# Altium PCB Transfomer_partly-interleaved.PcbDoc (part 2 of 2)
Units mm, origin at the board's own origin, x right, y up, seen from the top; angles counter-clockwise.
Board outline 177 x 117 mm, 6 copper layers (Top Layer, Mid-Layer 1, Mid-Layer 2, Mid-Layer 3, Mid-Layer 4, Bottom Layer); 9 components, 18 nets, 68 pads, 540 vias.
Unrouted connection lines stored in the file: 15.
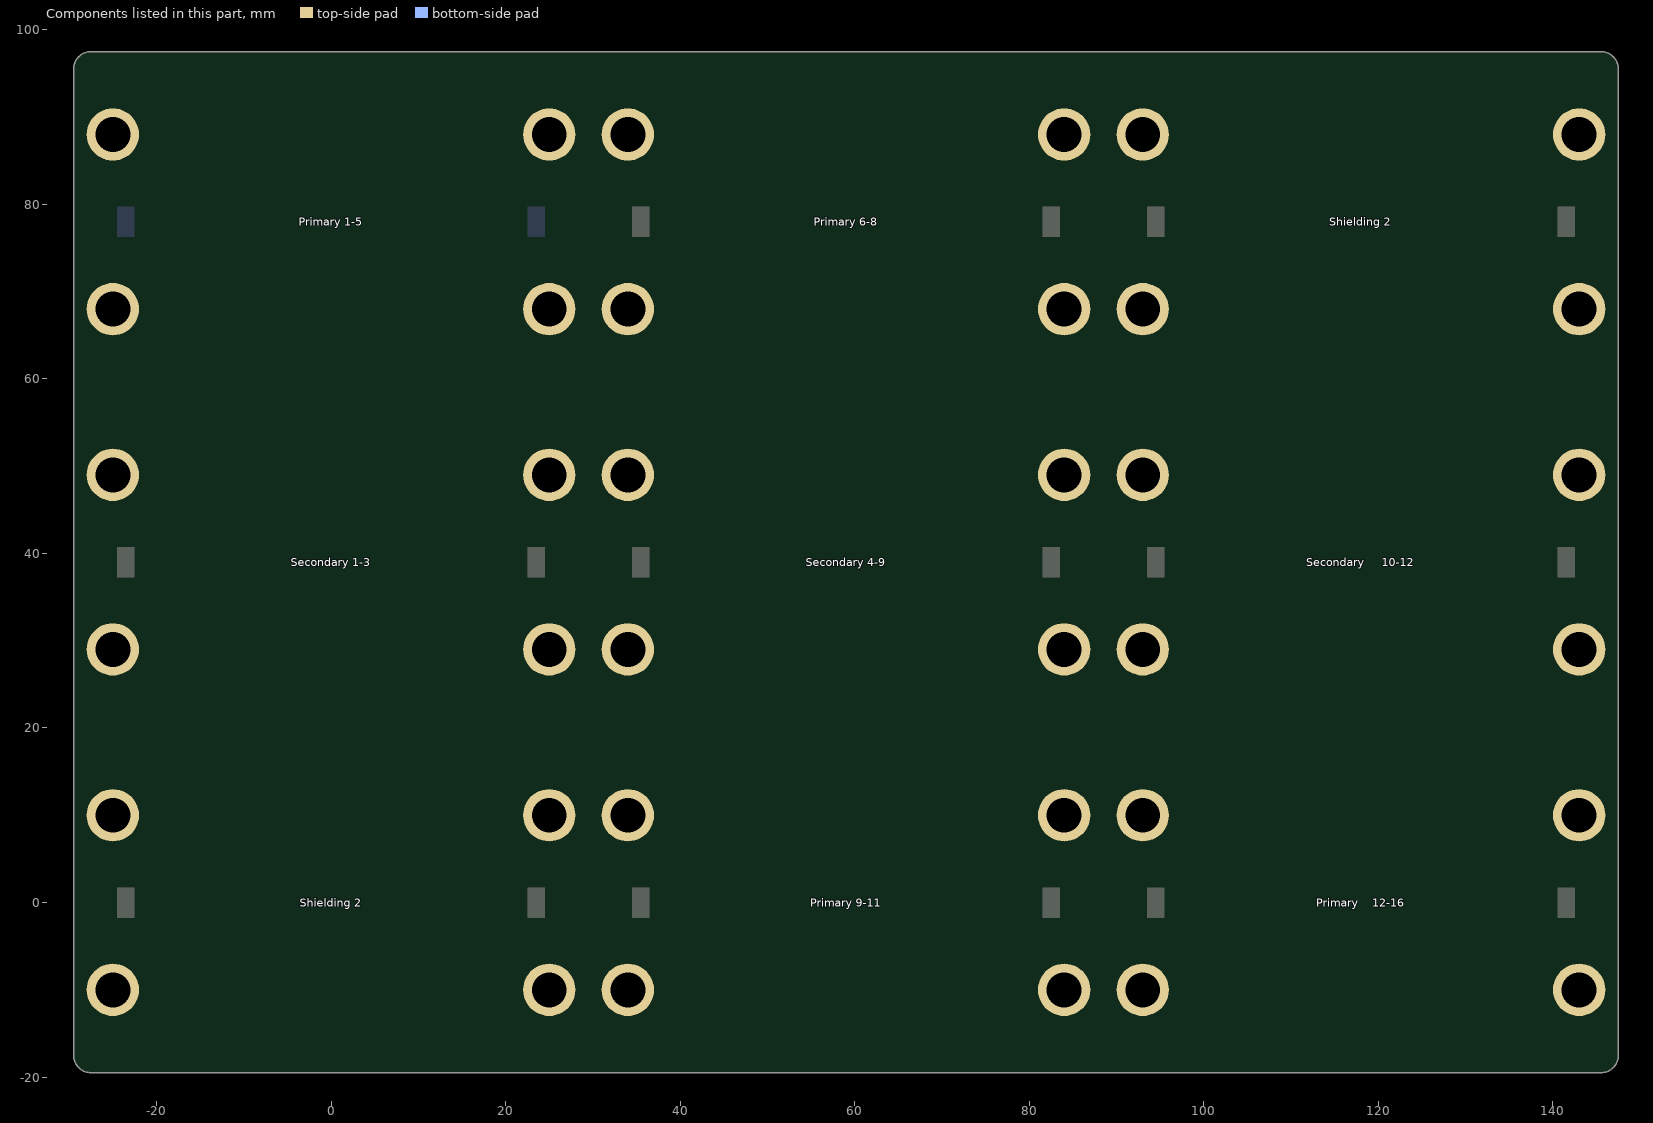
[diagram p6: the components of this part, seen from the top]

## Keep-outs (continued)
Mid-Layer 2:
  circle w1: c93,-10 r3.5
  circle w1: c143,-10 r3.5
  circle w1: c93,10 r3.5
  circle w1: c84,10 r3.5
  circle w1: c34,10 r3.5
  circle w1: c84,-10 r3.5
  circle w1: c34,-10 r3.5
  circle w1: c25,10 r3.5
  circle w1: c25,-10 r3.5
  circle w1: c-25,10 r3.5
  circle w1: c-25,-10 r3.5
  circle w1: c143,49 r3.5
  circle w1: c143,29 r3.5
  circle w1: c93,49 r3.5
  circle w1: c93,29 r3.5
  circle w1: c34,29 r3.5
  circle w1: c34,49 r3.5
  circle w1: c84,29 r3.5
  circle w1: c84,49 r3.5
  circle w1: c25,49 r3.5
  circle w1: c-25,49 r3.5
  circle w1: c25,29 r3.5
  circle w1: c-25,29 r3.5
  circle w1: c143,88 r3.5
  circle w1: c143,68 r3.5
  circle w1: c93,88 r3.5
  circle w1: c93,68 r3.5
  circle w1: c34,68 r3.5
  circle w1: c34,88 r3.5
  circle w1: c84,68 r3.5
  circle w1: c84,88 r3.5
  circle w1: c25,88 r3.5
  circle w1: c25,68 r3.5
  circle w1: c-25,88 r3.5
  circle w1: c-25,68 r3.5
  lines w1: -29,-6.5 -25,-6.5 ; -29,6.5 -25,6.5 ; -29,32.5 -25,32.5 ; -29,45.5 -25,45.5 ; -29,71.5 -25,71.5 ; -29,84.5 -25,84.5 ; -21.5,-14 -21.5,-10 ; -21.5,10 -21.5,14 ; -21.5,25 -21.5,29 ; -21.5,49 -21.5,53 ; -21.5,64 -21.5,68 ; -21.5,88 -21.5,92 ; -11,19.947 cw(c0,39) -11,58.053 ; 5.25,31.75 14,31.75 ccw(c14,35.75) 18,35.75 18,38.5 cw(c25,38.5) 25,45.5 29,45.5 ; 21.5,-14 21.5,-10 ; 21.5,10 21.5,14 ; 21.5,25 21.5,29 ; 21.5,49 21.5,53 ; 21.5,64 21.5,68 ; 21.5,88 21.5,92 ; 25,-6.5 29,-6.5 ; 25,6.5 29,6.5 ; 25,32.5 29,32.5 ; 25,71.5 29,71.5 ; 25,84.5 29,84.5 ; 30,-6.5 34,-6.5 ccw(c34,0.5) 41,0.5 41,3.25 cw(c45,3.25) 45,7.25 53.75,7.25 ; 30,6.5 34,6.5 ; 30,32.5 34,32.5 ccw(c34,39.5) 41,39.5 41,42.25 cw(c45,42.25) 45,46.25 53.75,46.25 ; 30,39 33,39 33,32.5 ; 30,45.5 34,45.5 ; 30,71.5 34,71.5 ; 30,84.5 34,84.5 ; 37.5,-14 37.5,-10 ; 37.5,10 37.5,14 ; 37.5,25 37.5,29 ; 37.5,49 37.5,53 ; 37.5,64 37.5,68 ; 37.5,88 37.5,92 ; 70,-19.053 ccw(c59,0) 70,19.053 ; 70,19.947 ccw(c59,39) 70,58.053 ; 80.5,-14 80.5,-10 ; 80.5,10 80.5,14 ; 80.5,25 80.5,29 ; 80.5,49 80.5,53 ; 80.5,64 80.5,68 ; 80.5,88 80.5,92 ; 84,-6.5 88,-6.5 ; 84,6.5 88,6.5 ; 84,32.5 88,32.5 ; 84,45.5 88,45.5 ; 84,71.5 88,71.5 ; 84,84.5 88,84.5 ; 89,-6.5 93,-6.5 ; 89,6.5 93,6.5 ; 89,32.5 93,32.5 ; 89,45.5 93,45.5 ; 89,71.5 93,71.5 ; 89,78 92,78 92,84.5 ; 89,84.5 93,84.5 cw(c93,77.5) 100,77.5 100,74.75 ccw(c104,74.75) 104,70.75 112.75,70.75 ; 96.5,-14 96.5,-10 ; 96.5,10 96.5,14 ; 96.5,25 96.5,29 ; 96.5,49 96.5,53 ; 96.5,64 96.5,68 ; 96.5,88 96.5,92 ; 107,-19.053 cw(c118,0) 107,19.053 ; 123,7.5 140.5,7.5 ; 129,58.947 ccw(c118,78) 129,97.053 ; 139.5,-14 139.5,-10 ; 139.5,25 139.5,29 ; 139.5,49 139.5,53 ; 139.5,64 139.5,68 ; 139.5,88 139.5,92 ; 140.525,7.525 ccw(c143,10) 143,6.5 147,6.5 ; 143,-6.5 147,-6.5 ; 143,32.5 147,32.5 ; 143,45.5 147,45.5 ; 143,71.5 147,71.5 ; 143,84.5 147,84.5
  lines w3: 31.5,33.5 31.5,38 ; 90.5,79 90.5,83.5
  lines w4: -9.959,33.25 cw(c0,39) -9.959,44.75 ; 68.959,-5.75 ccw(c59,0) 68.959,5.75 ; 68.959,33.25 ccw(c59,39) 68.959,44.75 ; 108.041,-5.75 cw(c118,0) 108.041,5.75 ; 127.959,-5.75 ccw(c118,0) 127.959,5.75 ; 127.959,72.25 ccw(c118,78) 127.959,83.75
Mid-Layer 3:
  circle w1: c93,-10 r3.5
  circle w1: c93,10 r3.5
  circle w1: c143,-10 r3.5
  circle w1: c143,10 r3.5
  circle w1: c34,-10 r3.5
  circle w1: c34,10 r3.5
  circle w1: c84,-10 r3.5
  circle w1: c84,10 r3.5
  circle w1: c25,-10 r3.5
  circle w1: c-25,-10 r3.5
  circle w1: c25,10 r3.5
  circle w1: c-25,10 r3.5
  circle w1: c93,49 r3.5
  circle w1: c143,49 r3.5
  circle w1: c93,29 r3.5
  circle w1: c143,29 r3.5
  circle w1: c84,49 r3.5
  circle w1: c34,49 r3.5
  circle w1: c84,29 r3.5
  circle w1: c34,29 r3.5
  circle w1: c25,49 r3.5
  circle w1: c25,29 r3.5
  circle w1: c-25,49 r3.5
  circle w1: c-25,29 r3.5
  circle w1: c93,88 r3.5
  circle w1: c143,88 r3.5
  circle w1: c93,68 r3.5
  circle w1: c143,68 r3.5
  circle w1: c34,88 r3.5
  circle w1: c84,88 r3.5
  circle w1: c34,68 r3.5
  circle w1: c84,68 r3.5
  circle w1: c25,88 r3.5
  circle w1: c-25,88 r3.5
  circle w1: c-25,68 r3.5
  lines w1: -29,-6.5 -25,-6.5 ccw(c-25,0.5) -18,0.5 -18,3.25 cw(c-14,3.25) -14,7.25 -5.25,7.25 ; -29,0 -26,0 -26,-6.5 ; -29,6.5 -25,6.5 ; -29,32.5 -25,32.5 ; -29,45.5 -25,45.5 ; -29,71.5 -25,71.5 ; -29,84.5 -25,84.5 ; -21.5,-14 -21.5,-10 ; -21.5,10 -21.5,14 ; -21.5,25 -21.5,29 ; -21.5,49 -21.5,53 ; -21.5,64 -21.5,68 ; -21.5,88 -21.5,92 ; -11,58.947 cw(c0,78) -11,97.053 ; 5,70.5 22.5,70.5 ; 11,-19.053 ccw(c0,0) 11,19.053 ; 21.5,-14 21.5,-10 ; 21.5,10 21.5,14 ; 21.5,25 21.5,29 ; 21.5,49 21.5,53 ; 21.5,88 21.5,92 ; 22.525,70.475 cw(c25,68) 25,71.5 29,71.5 ; 25,-6.5 29,-6.5 ; 25,6.5 29,6.5 ; 25,32.5 29,32.5 ; 25,45.5 29,45.5 ; 25,84.5 29,84.5 ; 30,-6.5 34,-6.5 ; 30,6.5 34,6.5 ; 30,32.5 34,32.5 ; 30,39 33,39 33,45.5 ; 30,45.5 34,45.5 cw(c34,38.5) 41,38.5 41,35.75 ccw(c45,35.75) 45,31.75 53.75,31.75 ; 30,71.5 34,71.5 ; 30,84.5 34,84.5 cw(c34,77.5) 41,77.5 41,74.75 ccw(c45,74.75) 45,70.75 53.75,70.75 ; 37.5,-14 37.5,-10 ; 37.5,10 37.5,14 ; 37.5,25 37.5,29 ; 37.5,49 37.5,53 ; 37.5,64 37.5,68 ; 37.5,88 37.5,92 ; 70,19.947 ccw(c59,39) 70,58.053 ; 70,58.947 ccw(c59,78) 70,97.053 ; 80.5,-14 80.5,-10 ; 80.5,10 80.5,14 ; 80.5,25 80.5,29 ; 80.5,49 80.5,53 ; 80.5,64 80.5,68 ; 80.5,88 80.5,92 ; 84,-6.5 88,-6.5 ; 84,6.5 88,6.5 ; 84,32.5 88,32.5 ; 84,45.5 88,45.5 ; 84,71.5 88,71.5 ; 84,84.5 88,84.5 ; 89,-6.5 93,-6.5 ; 89,6.5 93,6.5 ; 89,32.5 93,32.5 ; 89,45.5 93,45.5 ; 89,71.5 93,71.5 ; 89,84.5 93,84.5 ; 96.5,-14 96.5,-10 ; 96.5,10 96.5,14 ; 96.5,25 96.5,29 ; 96.5,49 96.5,53 ; 96.5,64 96.5,68 ; 96.5,88 96.5,92 ; 107,19.947 cw(c118,39) 107,58.053 ; 123.25,46.25 132,46.25 cw(c132,42.25) 136,42.25 136,39.5 ccw(c143,39.5) 143,32.5 147,32.5 ; 139.5,-14 139.5,-10 ; 139.5,10 139.5,14 ; 139.5,25 139.5,29 ; 139.5,49 139.5,53 ; 139.5,64 139.5,68 ; 139.5,88 139.5,92 ; 143,-6.5 147,-6.5 ; 143,6.5 147,6.5 ; 143,45.5 147,45.5 ; 143,71.5 147,71.5 ; 143,84.5 147,84.5
  lines w3: -27.5,-5.5 -27.5,-1 ; 31.5,40 31.5,44.5
  lines w4: -9.959,72.25 cw(c0,78) -9.959,83.75 ; 9.959,-5.75 ccw(c0,0) 9.959,5.75 ; 9.959,72.25 ccw(c0,78) 9.959,83.75 ; 68.959,33.25 ccw(c59,39) 68.959,44.75 ; 68.959,72.25 ccw(c59,78) 68.959,83.75 ; 108.041,33.25 cw(c118,39) 108.041,44.75
Mid-Layer 4:
  circle w1: c143,10 r3.5
  circle w1: c93,10 r3.5
  circle w1: c143,-10 r3.5
  circle w1: c34,-10 r3.5
  circle w1: c84,-10 r3.5
  circle w1: c34,10 r3.5
  circle w1: c84,10 r3.5
  circle w1: c25,10 r3.5
  circle w1: c-25,10 r3.5
  circle w1: c25,-10 r3.5
  circle w1: c-25,-10 r3.5
  circle w1: c93,29 r3.5
  circle w1: c93,49 r3.5
  circle w1: c143,29 r3.5
  circle w1: c143,49 r3.5
  circle w1: c34,29 r3.5
  circle w1: c34,49 r3.5
  circle w1: c84,29 r3.5
  circle w1: c84,49 r3.5
  circle w1: c-25,29 r3.5
  circle w1: c25,29 r3.5
  circle w1: c-25,49 r3.5
  circle w1: c25,49 r3.5
  circle w1: c143,88 r3.5
  circle w1: c143,68 r3.5
  circle w1: c93,88 r3.5
  circle w1: c93,68 r3.5
  circle w1: c84,88 r3.5
  circle w1: c84,68 r3.5
  circle w1: c34,88 r3.5
  circle w1: c34,68 r3.5
  circle w1: c25,88 r3.5
  circle w1: c25,68 r3.5
  circle w1: c-25,88 r3.5
  circle w1: c-25,68 r3.5
  lines w1: -29,-6.5 -25,-6.5 ; -29,0 -26,0 -26,6.5 ; -29,6.5 -25,6.5 cw(c-25,-0.5) -18,-0.5 -18,-3.25 ccw(c-14,-3.25) -14,-7.25 -5.25,-7.25 ; -29,32.5 -25,32.5 ; -29,45.5 -25,45.5 cw(c-25,38.5) -18,38.5 -18,35.75 ccw(c-14,35.75) -14,31.75 -5.25,31.75 ; -29,71.5 -25,71.5 ; -29,84.5 -25,84.5 ; -21.5,-14 -21.5,-10 ; -21.5,10 -21.5,14 ; -21.5,25 -21.5,29 ; -21.5,49 -21.5,53 ; -21.5,64 -21.5,68 ; -21.5,88 -21.5,92 ; 11,-19.053 ccw(c0,0) 11,19.053 ; 11,19.947 ccw(c0,39) 11,58.053 ; 21.5,-14 21.5,-10 ; 21.5,10 21.5,14 ; 21.5,25 21.5,29 ; 21.5,49 21.5,53 ; 21.5,64 21.5,68 ; 21.5,88 21.5,92 ; 25,-6.5 29,-6.5 ; 25,6.5 29,6.5 ; 25,32.5 29,32.5 ; 25,45.5 29,45.5 ; 25,71.5 29,71.5 ; 25,84.5 29,84.5 ; 30,-6.5 34,-6.5 ; 30,6.5 34,6.5 ; 30,32.5 34,32.5 ; 30,45.5 34,45.5 ; 30,71.5 34,71.5 ; 30,84.5 34,84.5 ; 37.5,-14 37.5,-10 ; 37.5,10 37.5,14 ; 37.5,25 37.5,29 ; 37.5,49 37.5,53 ; 37.5,64 37.5,68 ; 37.5,88 37.5,92 ; 48,-19.053 cw(c59,0) 48,19.053 ; 64.25,7.25 73,7.25 cw(c73,3.25) 77,3.25 77,0.5 ccw(c84,0.5) 84,-6.5 88,-6.5 ; 80.5,-14 80.5,-10 ; 80.5,10 80.5,14 ; 80.5,25 80.5,29 ; 80.5,49 80.5,53 ; 80.5,64 80.5,68 ; 80.5,88 80.5,92 ; 84,6.5 88,6.5 ; 84,32.5 88,32.5 ; 84,45.5 88,45.5 ; 84,71.5 88,71.5 ; 84,84.5 88,84.5 ; 89,-6.5 93,-6.5 cw(c93,-10) 95.475,-7.525 ; 89,6.5 93,6.5 ; 89,32.5 93,32.5 ; 89,45.5 93,45.5 ; 89,71.5 93,71.5 ; 89,84.5 93,84.5 ; 92,-6.5 92,6.5 ; 95.5,-7.5 113,-7.5 ; 96.5,10 96.5,14 ; 96.5,25 96.5,29 ; 96.5,49 96.5,53 ; 96.5,64 96.5,68 ; 96.5,88 96.5,92 ; 107,58.947 cw(c118,78) 107,97.053 ; 123.25,85.25 132,85.25 cw(c132,81.25) 136,81.25 136,78.5 ccw(c143,78.5) 143,71.5 147,71.5 ; 129,-19.053 ccw(c118,0) 129,19.053 ; 139.5,-14 139.5,-10 ; 139.5,10 139.5,14 ; 139.5,25 139.5,29 ; 139.5,49 139.5,53 ; 139.5,64 139.5,68 ; 139.5,88 139.5,92 ; 143,-6.5 147,-6.5 ; 143,6.5 147,6.5 ; 143,32.5 147,32.5 ; 143,45.5 147,45.5 ; 143,84.5 147,84.5
  lines w3: -27.5,1 -27.5,5.5 ; 90.5,-5.5 90.5,5.5
  lines w4: 9.959,-5.75 ccw(c0,0) 9.959,5.75 ; 9.959,33.25 ccw(c0,39) 9.959,44.75 ; 49.041,-5.75 cw(c59,0) 49.041,5.75 ; 108.041,72.25 cw(c118,78) 108.041,83.75 ; 127.959,-5.75 ccw(c118,0) 127.959,5.75
Bottom Layer:
  circle w1: c143,10 r3.5
  circle w1: c93,10 r3.5
  circle w1: c143,-10 r3.5
  circle w1: c93,-10 r3.5
  circle w1: c34,10 r3.5
  circle w1: c84,10 r3.5
  circle w1: c34,-10 r3.5
  circle w1: c84,-10 r3.5
  circle w1: c25,10 r3.5
  circle w1: c-25,10 r3.5
  circle w1: c25,-10 r3.5
  circle w1: c-25,-10 r3.5
  circle w1: c143,49 r3.5
  circle w1: c143,29 r3.5
  circle w1: c93,49 r3.5
  circle w1: c93,29 r3.5
  circle w1: c34,29 r3.5
  circle w1: c34,49 r3.5
  circle w1: c84,29 r3.5
  circle w1: c84,49 r3.5
  circle w1: c-25,29 r3.5
  circle w1: c25,29 r3.5
  circle w1: c-25,49 r3.5
  circle w1: c25,49 r3.5
  circle w1: c93,88 r3.5
  circle w1: c93,68 r3.5
  circle w1: c143,88 r3.5
  circle w1: c143,68 r3.5
  circle w1: c84,88 r3.5
  circle w1: c84,68 r3.5
  circle w1: c34,88 r3.5
  circle w1: c34,68 r3.5
  circle w1: c25,88 r3.5
  circle w1: c25,68 r3.5
  circle w1: c-25,88 r3.5
  circle w1: c-25,68 r3.5
  lines w1: -29,-6.5 -25,-6.5 ; -29,0 -26,0 -26,6.5 ; -29,6.5 -25,6.5 ; -29,32.5 -25,32.5 ; -29,45.5 -25,45.5 ; -29,71.5 -25,71.5 ; -29,84.5 -25,84.5 cw(c-25,77.5) -18,77.5 -18,74.75 ccw(c-14,74.75) -14,70.75 -5.25,70.75 ; -26,71.5 -26,84.5 ; -21.5,-14 -21.5,-10 ; -21.5,10 -21.5,14 ; -21.5,25 -21.5,29 ; -21.5,49 -21.5,53 ; -21.5,64 -21.5,68 ; -21.5,88 -21.5,92 ; 10,60.679 ccw(c0,78) 10,95.321 ; 21.5,-14 21.5,-10 ; 21.5,10 21.5,14 ; 21.5,25 21.5,29 ; 21.5,49 21.5,53 ; 21.5,64 21.5,68 ; 21.5,88 21.5,92 ; 25,-6.5 29,-6.5 ; 25,6.5 29,6.5 ; 25,32.5 29,32.5 ; 25,45.5 29,45.5 ; 25,71.5 29,71.5 ; 25,84.5 29,84.5 ; 26,-6.5 26,6.5 ; 26,32.5 26,45.5 ; 30,-6.5 34,-6.5 ; 30,6.5 34,6.5 ; 30,32.5 34,32.5 ; 30,39 33,39 33,45.5 ; 30,45.5 34,45.5 ; 30,71.5 34,71.5 ; 30,84.5 34,84.5 ; 33,-6.5 33,6.5 ; 37.5,-14 37.5,-10 ; 37.5,10 37.5,14 ; 37.5,25 37.5,29 ; 37.5,49 37.5,53 ; 37.5,64 37.5,68 ; 37.5,88 37.5,92 ; 49,21.679 cw(c59,39) 49,56.321 ; 49,60.679 cw(c59,78) 49,95.321 ; 64.25,46.25 73,46.25 cw(c73,42.25) 77,42.25 77,39.5 ccw(c84,39.5) 84,32.5 88,32.5 ; 64.25,85.25 73,85.25 cw(c73,81.25) 77,81.25 77,78.5 ccw(c84,78.5) 84,71.5 88,71.5 ; 80.5,-14 80.5,-10 ; 80.5,10 80.5,14 ; 80.5,25 80.5,29 ; 80.5,49 80.5,53 ; 80.5,64 80.5,68 ; 80.5,88 80.5,92 ; 84,-6.5 88,-6.5 ; 84,6.5 88,6.5 ; 84,45.5 88,45.5 ; 84,84.5 88,84.5 ; 85,32.5 85,45.5 ; 85,71.5 85,84.5 ; 89,-6.5 93,-6.5 ; 89,6.5 93,6.5 ; 89,32.5 93,32.5 ; 89,45.5 93,45.5 cw(c93,38.5) 100,38.5 100,35.75 ccw(c104,35.75) 104,31.75 112.75,31.75 ; 89,71.5 93,71.5 ; 89,78 92,78 92,84.5 ; 89,84.5 93,84.5 ; 92,32.5 92,45.5 ; 96.5,-14 96.5,-10 ; 96.5,10 96.5,14 ; 96.5,25 96.5,29 ; 96.5,49 96.5,53 ; 96.5,64 96.5,68 ; 96.5,88 96.5,92 ; 128,21.679 ccw(c118,39) 128,56.321 ; 139.5,-14 139.5,-10 ; 139.5,10 139.5,14 ; 139.5,25 139.5,29 ; 139.5,49 139.5,53 ; 139.5,64 139.5,68 ; 139.5,88 139.5,92 ; 143,-6.5 147,-6.5 ; 143,6.5 147,6.5 ; 143,32.5 147,32.5 ; 143,45.5 147,45.5 ; 143,71.5 147,71.5 ; 143,84.5 147,84.5
  lines w3: -27.5,1 -27.5,5.5 ; -27.5,72.5 -27.5,83.5 ; 27.5,-5.5 27.5,5.5 ; 27.5,33.5 27.5,44.5 ; 31.5,-5.5 31.5,5.5 ; 31.5,40 31.5,44.5 ; 86.5,33.5 86.5,44.5 ; 86.5,72.5 86.5,83.5 ; 90.5,33.5 90.5,44.5 ; 90.5,79 90.5,83.5
  lines w4: 9.959,72.25 ccw(c0,78) 9.959,83.75 ; 49.041,33.25 cw(c59,39) 49.041,44.75 ; 49.041,72.25 cw(c59,78) 49.041,83.75 ; 127.959,33.25 ccw(c118,39) 127.959,44.75
Keep-Out Layer:
  lines w0.254: -19.5,19.5 -27.5,19.5 ; -19.5,58.5 -27.5,58.5 ; 19.5,19.5 27.5,19.5 ; 19.5,58.5 27.5,58.5 ; 39.5,19.5 31.5,19.5 ; 39.5,58.5 31.5,58.5 ; 78.5,19.5 86.5,19.5 ; 78.5,58.5 86.5,58.5 ; 98.5,19.5 90.5,19.5 ; 98.5,58.5 90.5,58.5 ; 137.5,19.5 145.5,19.5 ; 137.5,58.5 145.5,58.5 ; -29.5,-17.5 ccw(c-27.5,-17.5) -27.5,-19.5 ; -29.5,-17.5 ccw(c-27.5,-17.5) -27.5,-19.5 ; -29.5,-17.5 -29.5,95.5 ; -29.5,-17.5 -29.5,17.5 cw(c-27.5,17.5) -27.5,19.5 ; -29.5,95.5 cw(c-27.5,95.5) -27.5,97.5 ; -29.5,95.5 cw(c-27.5,95.5) -27.5,97.5 ; -29.5,95.5 cw(c-27.5,95.5) -27.5,97.5 ; -29.5,95.5 -29.5,60.5 ccw(c-27.5,60.5) -27.5,58.5 ; -27.5,-19.5 27.5,-19.5 ccw(c27.5,-17.5) 29.5,-17.5 ; -27.5,-19.5 145.5,-19.5 ; -27.5,19.5 cw(c-27.5,21.5) -29.5,21.5 -29.5,56.5 cw(c-27.5,56.5) -27.5,58.5 ; -27.5,97.5 145.5,97.5 ; -27.5,97.5 27.5,97.5 cw(c27.5,95.5) 29.5,95.5 ; 27.5,19.5 ccw(c27.5,21.5) 29.5,21.5 ; 27.5,19.5 cw(c27.5,17.5) 29.5,17.5 ; 27.5,58.5 cw(c27.5,56.5) 29.5,56.5 ; 27.5,58.5 ccw(c27.5,60.5) 29.5,60.5 ; 29.5,-17.5 ccw(c31.5,-17.5) 31.5,-19.5 86.5,-19.5 ccw(c86.5,-17.5) 88.5,-17.5 ; 29.5,-17.5 29.5,17.5 ; 29.5,17.5 cw(c31.5,17.5) 31.5,19.5 ; 29.5,21.5 ccw(c31.5,21.5) 31.5,19.5 ; 29.5,21.5 29.5,56.5 ; 29.5,56.5 cw(c31.5,56.5) 31.5,58.5 ; 29.5,60.5 ccw(c31.5,60.5) 31.5,58.5 ; 29.5,60.5 29.5,95.5 ; 29.5,95.5 cw(c31.5,95.5) 31.5,97.5 86.5,97.5 cw(c86.5,95.5) 88.5,95.5 ; 86.5,19.5 ccw(c86.5,21.5) 88.5,21.5 ; 86.5,19.5 cw(c86.5,17.5) 88.5,17.5 ; 86.5,58.5 cw(c86.5,56.5) 88.5,56.5 ; 86.5,58.5 ccw(c86.5,60.5) 88.5,60.5 ; 88.5,-17.5 ccw(c90.5,-17.5) 90.5,-19.5 145.5,-19.5 ; 88.5,-17.5 88.5,17.5 ; 88.5,17.5 cw(c90.5,17.5) 90.5,19.5 ; 88.5,21.5 ccw(c90.5,21.5) 90.5,19.5 ; 88.5,21.5 88.5,56.5 ; 88.5,56.5 cw(c90.5,56.5) 90.5,58.5 ; 88.5,60.5 ccw(c90.5,60.5) 90.5,58.5 ; 88.5,60.5 88.5,95.5 ; 88.5,95.5 cw(c90.5,95.5) 90.5,97.5 145.5,97.5 ; 145.5,-19.5 ccw(c145.5,-17.5) 147.5,-17.5 ; 145.5,-19.5 ccw(c145.5,-17.5) 147.5,-17.5 ; 145.5,19.5 ccw(c145.5,21.5) 147.5,21.5 147.5,56.5 ccw(c145.5,56.5) 145.5,58.5 ; 145.5,19.5 cw(c145.5,17.5) 147.5,17.5 147.5,-17.5 ; 145.5,58.5 ccw(c145.5,60.5) 147.5,60.5 147.5,95.5 ; 145.5,97.5 cw(c145.5,95.5) 147.5,95.5 ; 145.5,97.5 cw(c145.5,95.5) 147.5,95.5 ; 145.5,97.5 cw(c145.5,95.5) 147.5,95.5 ; 147.5,-17.5 147.5,95.5

## Silkscreen, mask and mechanical layers (free items; w line width, h text height)
Top Overlay:
  text "Primary 1-2" at -7.871,89.762 h1.52
  text "Primary 3" at 52.525,89.762 h1.52
  text "Primary 4-5" at 110.002,89.762 h1.52
  text "Secondary 1" at 7.871,66.238 h1.52 r180
  text "Secondary 2-3" at 68.649,66.238 h1.52 r180
  text "Secondary 4" at 126.125,66.238 h1.52 r180
  text "partly interleaved" at -13.5,65.5 h1.52 r90
  text "partly interleaved" at 45.5,65.5 h1.52 r90
  text "partly interleaved" at 104.5,65.5 h1.52 r90
  text "Primary 6-7" at -7.998,50.762 h1.52
  text "Primary 8-9" at 51.002,50.762 h1.52
  text "Primary 10-11" at 108.986,50.762 h1.52
  text "Secondary 5" at 8.125,27.238 h1.52 r180
  text "Secondary 6-7" at 68.649,27.238 h1.52 r180
  text "Secondary 8" at 126.125,27.238 h1.52 r180
  text "partly interleaved" at -13.5,26.5 h1.52 r90
  text "partly interleaved" at 45.5,26.5 h1.52 r90
  text "partly interleaved" at 104.5,26.5 h1.52 r90
  text "Primary 12-13" at -9.268,11.762 h1.52
  text "Primary 14" at 51.89,11.762 h1.52
  text "Primary 15-16" at 108.732,11.762 h1.52
  text "Secondary 9" at 8.125,-11.762 h1.52 r180
  text "Secondary 10-11" at 69.665,-11.762 h1.52 r180
  text "Secondary 12" at 126.76,-11.762 h1.52 r180
  text "partly interleaved" at -13.5,-12.5 h1.52 r90
  text "partly interleaved" at 45.5,-12.5 h1.52 r90
  text "partly interleaved" at 104.5,-12.5 h1.52 r90